# EAGLE board PowerBus v1_2 (EAGLE 9.6.2)
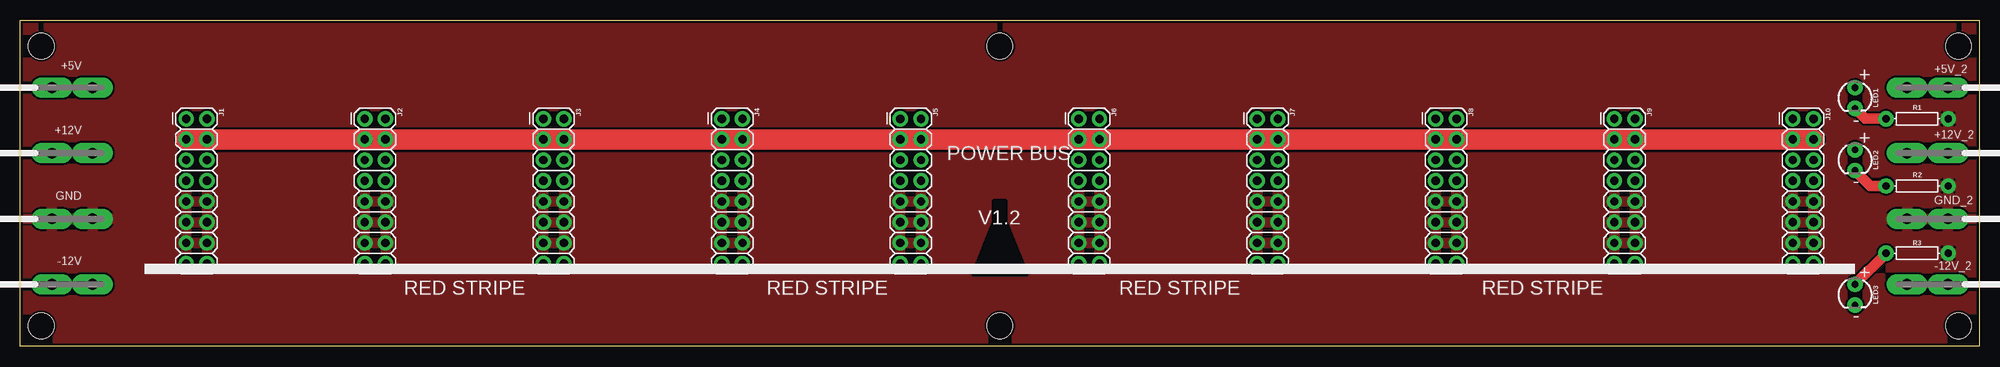
[diagram p0: board, top side]
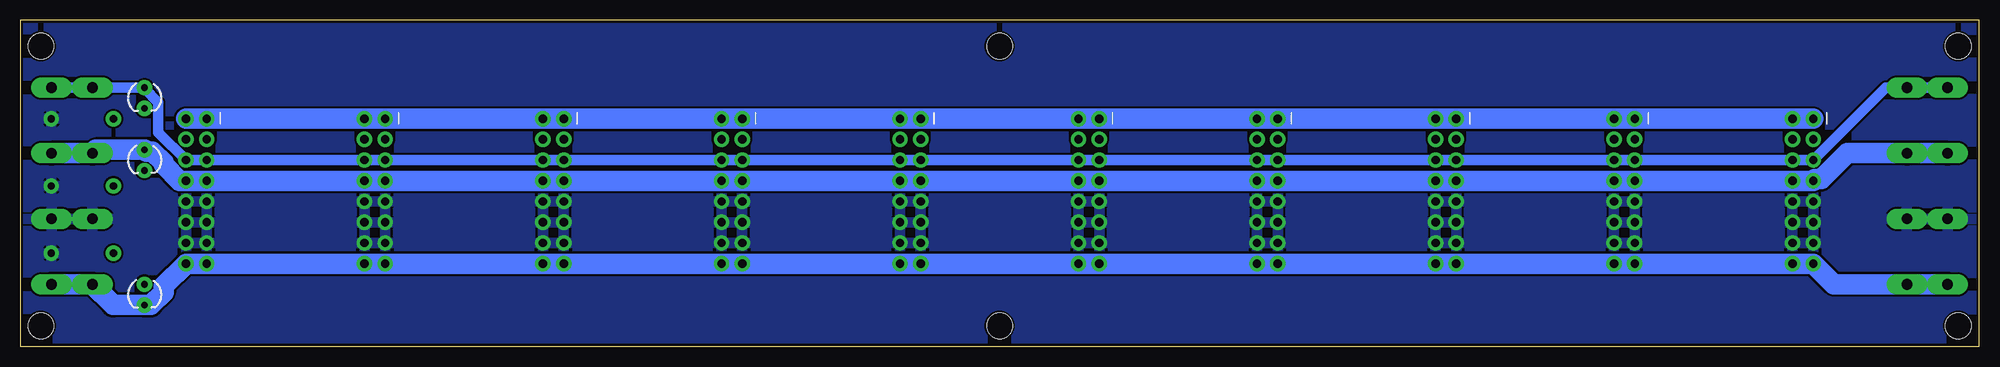
[diagram p1: board, bottom side, seen from below]

Size 240 x 40 mm. Coordinates in mm from the lower left corner, seen from the top.
Outline: 0,0 0,40 240,40 240,0 0,0
Copper layers (1*16): Top 0.035559375mm / dielectric 1.6mm / Bottom 0.035559375mm
Design rules "jlcpcb2layer": minimum track width 5mil, minimum drill 12mil, track to track 5mil, track to pad 5mil, pad to pad 5mil, via to via 5mil, smd to smd 5mil, copper to edge 8mil, drill to drill 6mil, minimum pad ring 5mil, minimum via ring 3mil, stop-mask expansion 2.5mil, vias tented up to drill 0mil, thermal gap 10mil
Holes 3.17 mm at 2.54,36.83 2.54,2.54 120.02,36.83 120.02,2.54 237.49,2.54 237.49,36.83
tRestrict: area 116.8,8.9 to 123.2,17.8

## Footprints (pad centres in the part's own frame; a part is rotated, then mirrored left to right if it is on the bottom)
F061.200 = drill 1.3 pad 2.5 long: 1A -2.5,0; 1B 2.5,0
2X8 = drill 1.016 pad 1.88: 1 0,0; 2 0,2.54; 3 2.54,0; 4 2.54,2.54; 5 5.08,0; 6 5.08,2.54; 7 7.62,0; 8 7.62,2.54; 9 10.16,0; 10 10.16,2.54; 11 12.7,0; 12 12.7,2.54; 13 15.24,0; 14 15.24,2.54; 15 17.78,0; 16 17.78,2.54
LED_3MM = drill 0.813 pad 1.88: A -1.27,0; K 1.27,0
AXIAL-0.3 = drill 0.9 pad 1.88: P$1 -3.81,0; P$2 3.81,0

## Placement (x,y rotation side)
+5V  PIN2F061.200  [F061.200]  6.35,31.75 180 top
+5V_2  PIN2F061.200  [F061.200]  233.68,31.75 0 top
+12V  PIN2F061.200  [F061.200]  6.35,23.71 180 top
+12V_2  PIN2F061.200  [F061.200]  233.68,23.71 0 top
-12V  PIN2F061.200  [F061.200]  6.35,7.62 180 top
-12V_2  PIN2F061.200  [F061.200]  233.68,7.62 0 top
GND  PIN2F061.200  [F061.200]  6.35,15.66 180 top
GND_2  PIN2F061.200  [F061.200]  233.68,15.66 0 top
J1  [2X8]  20.32,27.94 270 top
J2  [2X8]  42.19,27.94 270 top
J3  [2X8]  64.06,27.94 270 top
J4  [2X8]  85.94,27.94 270 top
J5  [2X8]  107.81,27.94 270 top
J6  [2X8]  129.68,27.94 270 top
J7  [2X8]  151.55,27.94 270 top
J8  [2X8]  173.43,27.94 270 top
J9  [2X8]  195.3,27.94 270 top
J10  [2X8]  217.17,27.94 270 top
LED1  [LED_3MM]  224.79,30.48 270 top
LED2  [LED_3MM]  224.79,22.86 270 top
LED3  [LED_3MM]  224.79,6.35 270 top
R1  560  [AXIAL-0.3]  232.41,27.94 0 top
R2  2.2k  [AXIAL-0.3]  232.41,19.68 0 top
R3  2.2k  [AXIAL-0.3]  232.41,11.43 180 top

## Library data of the parts
+5V +5V_2 +12V +12V_2 -12V -12V_2 GND GND_2 = my-library; OC_FARNELL: unknown; OC_NEWARK: unknown
J1-J10 = my-library
LED1-LED3 = my-library; PROD_ID: DIO-08794
R1-R3 = my-library; PROD_ID: RES-08380

## Nets
+5V: +5V.1A +5V.1B +5V_2.1A +5V_2.1B J1.5 J1.6 J2.5 J2.6 J3.5 J3.6 J4.5 J4.6 J5.5 J5.6 J6.5 J6.6 J7.5 J7.6 J8.5 J8.6 J9.5 J9.6 J10.5 J10.6 LED1.A
+12V: +12V.1A +12V.1B +12V_2.1A +12V_2.1B J1.7 J1.8 J2.7 J2.8 J3.7 J3.8 J4.7 J4.8 J5.7 J5.8 J6.7 J6.8 J7.7 J7.8 J8.7 J8.8 J9.7 J9.8 J10.7 J10.8 LED2.A
-12V: -12V.1A -12V.1B -12V_2.1A -12V_2.1B J1.15 J1.16 J2.15 J2.16 J3.15 J3.16 J4.15 J4.16 J5.15 J5.16 J6.15 J6.16 J7.15 J7.16 J8.15 J8.16 J9.15 J9.16 J10.15 J10.16 LED3.K
CV: J1.1 J1.2 J2.1 J2.2 J3.1 J3.2 J4.1 J4.2 J5.1 J5.2 J6.1 J6.2 J7.1 J7.2 J8.1 J8.2 J9.1 J9.2 J10.1 J10.2
GATE: J1.3 J1.4 J2.3 J2.4 J3.3 J3.4 J4.3 J4.4 J5.3 J5.4 J6.3 J6.4 J7.3 J7.4 J8.3 J8.4 J9.3 J9.4 J10.3 J10.4
GND: GND.1A GND.1B GND_2.1A GND_2.1B J1.9 J1.10 J1.11 J1.12 J1.13 J1.14 J2.9 J2.10 J2.11 J2.12 J2.13 J2.14 J3.9 J3.10 J3.11 J3.12 J3.13 J3.14 J4.9 J4.10 J4.11 J4.12 J4.13 J4.14 J5.9 J5.10 J5.11 J5.12 J5.13 J5.14 J6.9 J6.10 J6.11 J6.12 J6.13 J6.14 J7.9 J7.10 J7.11 J7.12 J7.13 J7.14 J8.9 J8.10 J8.11 J8.12 J8.13 J8.14 J9.9 J9.10 J9.11 J9.12 J9.13 J9.14 J10.9 J10.10 J10.11 J10.12 J10.13 J10.14 R1.P$2 R2.P$2 R3.P$1
N$1: LED1.K R1.P$1
N$2: LED2.K R2.P$1
N$6: LED3.A R3.P$2

## Tracks (layer width: path | path; a pad name or v marks a point on that pad's centre or on a via)
+5V
  Bottom 1.27: +5V.1B +5V.1A 11.43,31.75 J1.5 J1.6 J2.5 J2.6 J3.5 J3.6 J4.5 J4.6 J5.5 J5.6 J6.5 J6.6 J7.5 J7.6 J8.5 J8.6 J9.5 J9.6 J10.5 J10.6 223.09,26.24 223.09,29.91 224.79,31.62 LED1.A +5V_2.1A | +5V_2.1A | +5V_2.1A +5V_2.1B
+12V
  Bottom 2.54: +12V_2.1B +12V_2.1A 230.76,24.13 LED2.A 224.59,23.93 223.82,23.93 222.45,22.56 222.45,22.3 220.47,20.32 J10.8 J10.7 J9.8 J9.7 J8.8 J8.7 J7.8 J7.7 J6.8 J6.7 J5.8 J5.7 J4.8 J4.7 J3.8 J3.7 J2.8 J2.7 J1.8 J1.7 20.12,20.52 19.35,20.52 16.17,23.71 +12V.1A +12V.1B
-12V
  Bottom 2.54: -12V.1B -12V.1A 17.78,7.62 J1.15 J1.16 J2.15 J2.16 J3.15 J3.16 J4.15 J4.16 J5.15 J5.16 J6.15 J6.16 J7.15 J7.16 J8.15 J8.16 J9.15 J9.16 J10.15 J10.16 222.45,7.42 222.45,6.65 224.03,5.08 LED3.K 228.64,5.08 -12V_2.1A -12V_2.1B
CV
  Bottom 2.54: J10.2 J10.1 J9.2 J9.1 J8.2 J8.1 J7.2 J7.1 J6.2 J6.1 J5.2 J5.1 J4.2 J4.1 J3.2 J3.1 J2.2 J2.1 J1.2 J1.1
GATE
  Top 2.54: J1.3 J1.4 J2.3 J2.4 J3.3 J3.4 J4.3 J4.4 J5.3 J5.4 J6.3 J6.4 J7.3 J7.4 J8.3 J8.4 J9.3 J9.4 J10.3 J10.4
GND
  pour Bottom (isolate 0.254): 0,0 0,39.37 240.03,39.37 240.03,0
  pour Top (isolate 0.254): 0,0 0,39.37 240.03,39.37 240.03,0
N$1
  Top 1.27: LED1.K 226.06,27.94 R1.P$1
N$2
  Top 1.27: LED2.K 226.69,19.68 R2.P$1
N$6
  Top 1.27: LED3.A R3.P$2

## Text on the board
tPlace: POWER BUS | V1.2 | RED STRIPE | RED STRIPE | RED STRIPE | RED STRIPE
tNames: + | - | + | - | + | -